# Altium PCB V1_PCB.PcbDoc
Units mm, origin at the board's own origin, x right, y up, seen from the top; angles counter-clockwise.
Board outline 200 x 150 mm, 2 copper layers (Top Layer, Bottom Layer); 195 components, 116 nets, 653 pads, 117 vias.
Unrouted connection lines stored in the file: 129.
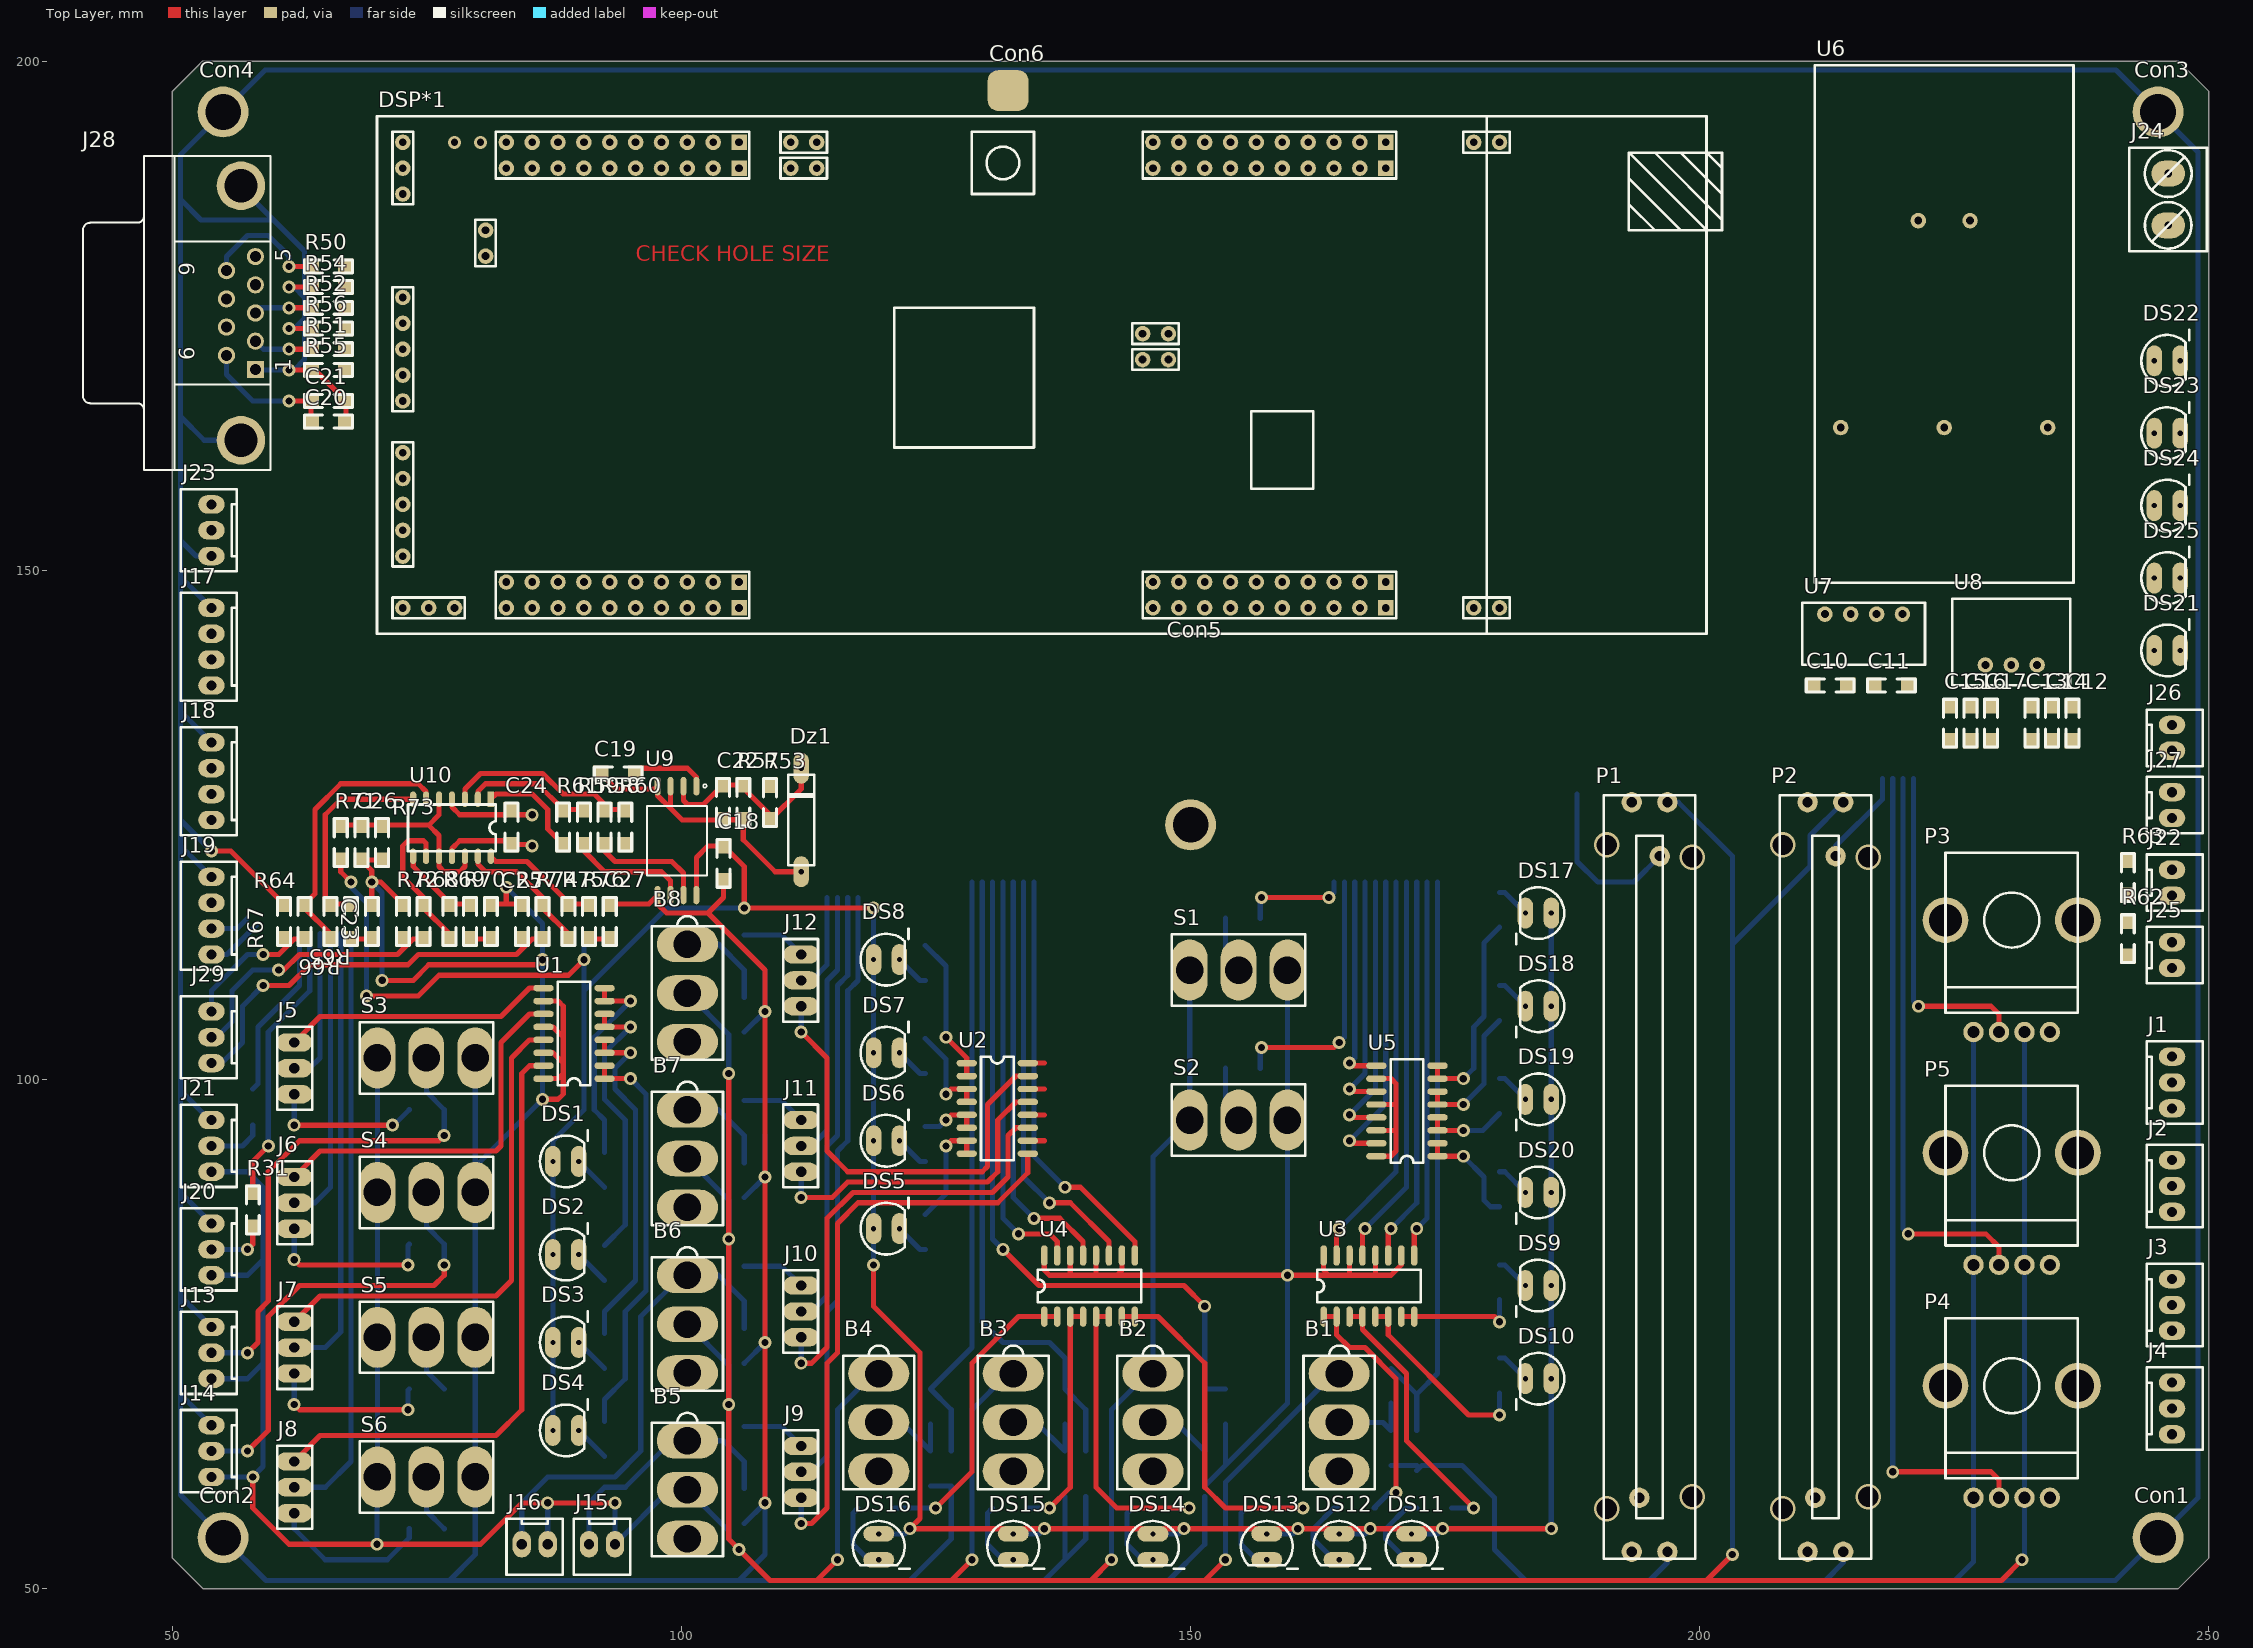
[diagram p0: Top Layer view]
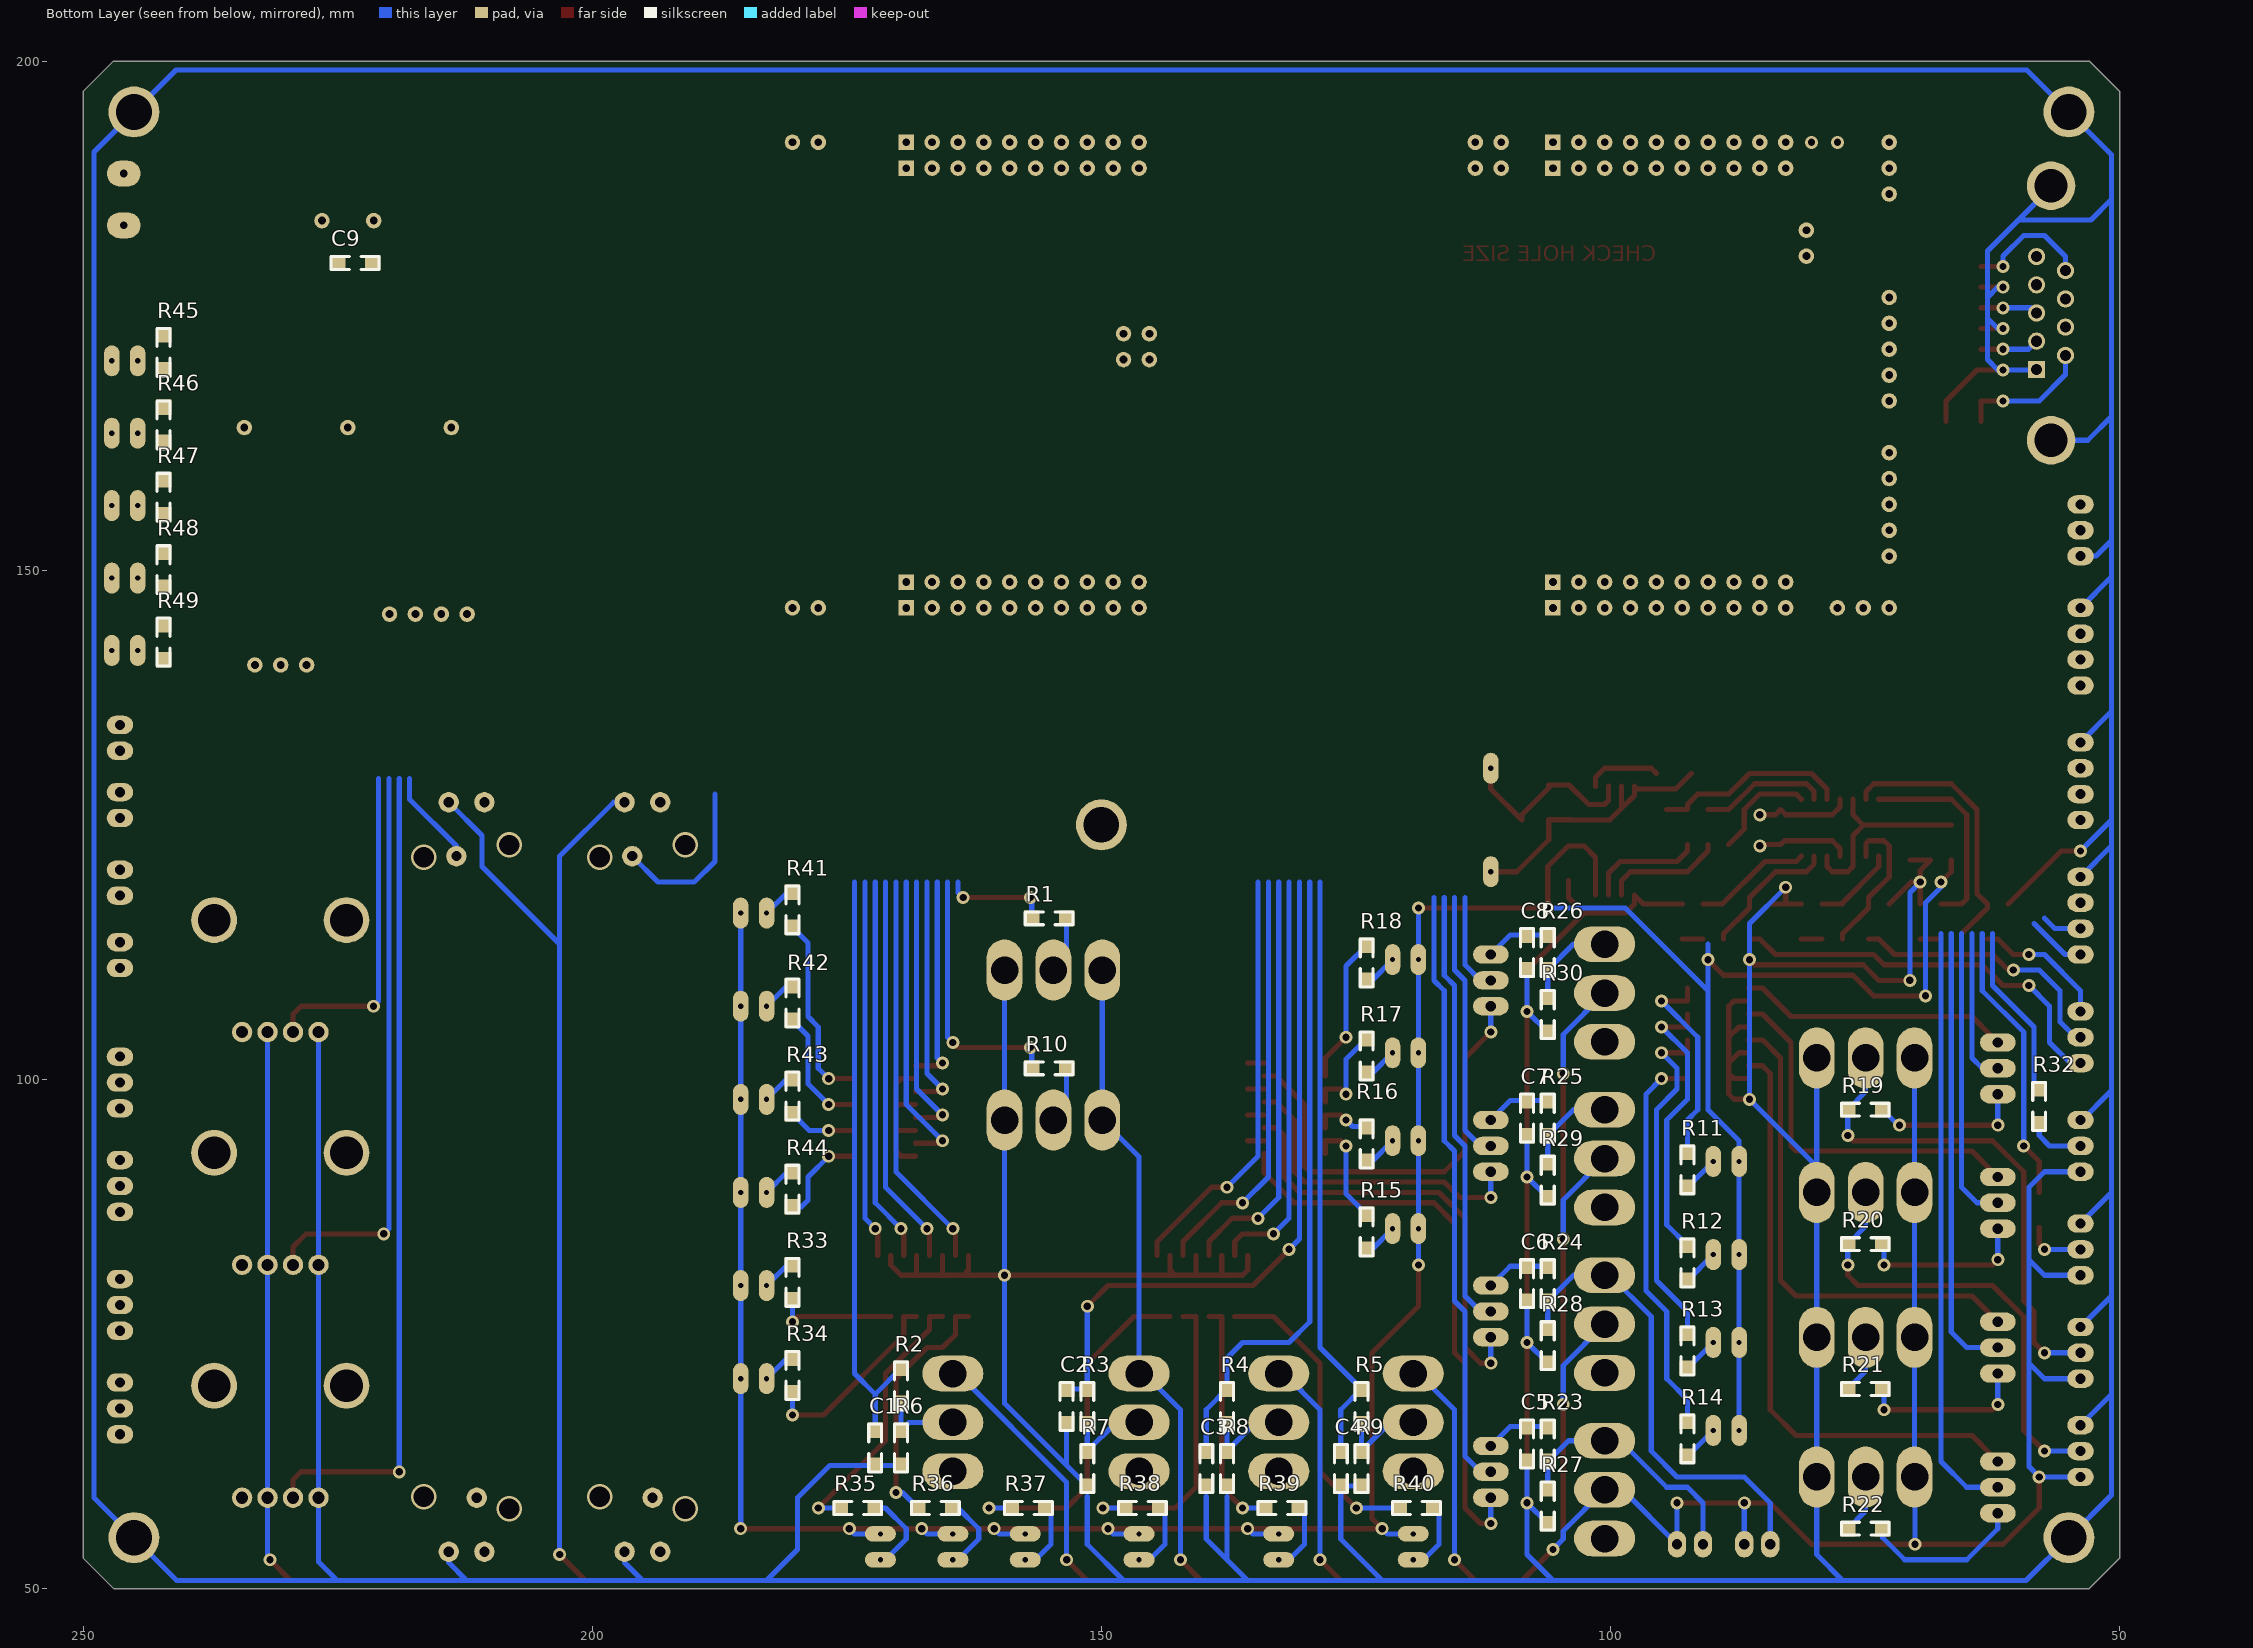
[diagram p1: Bottom Layer view, seen from below]
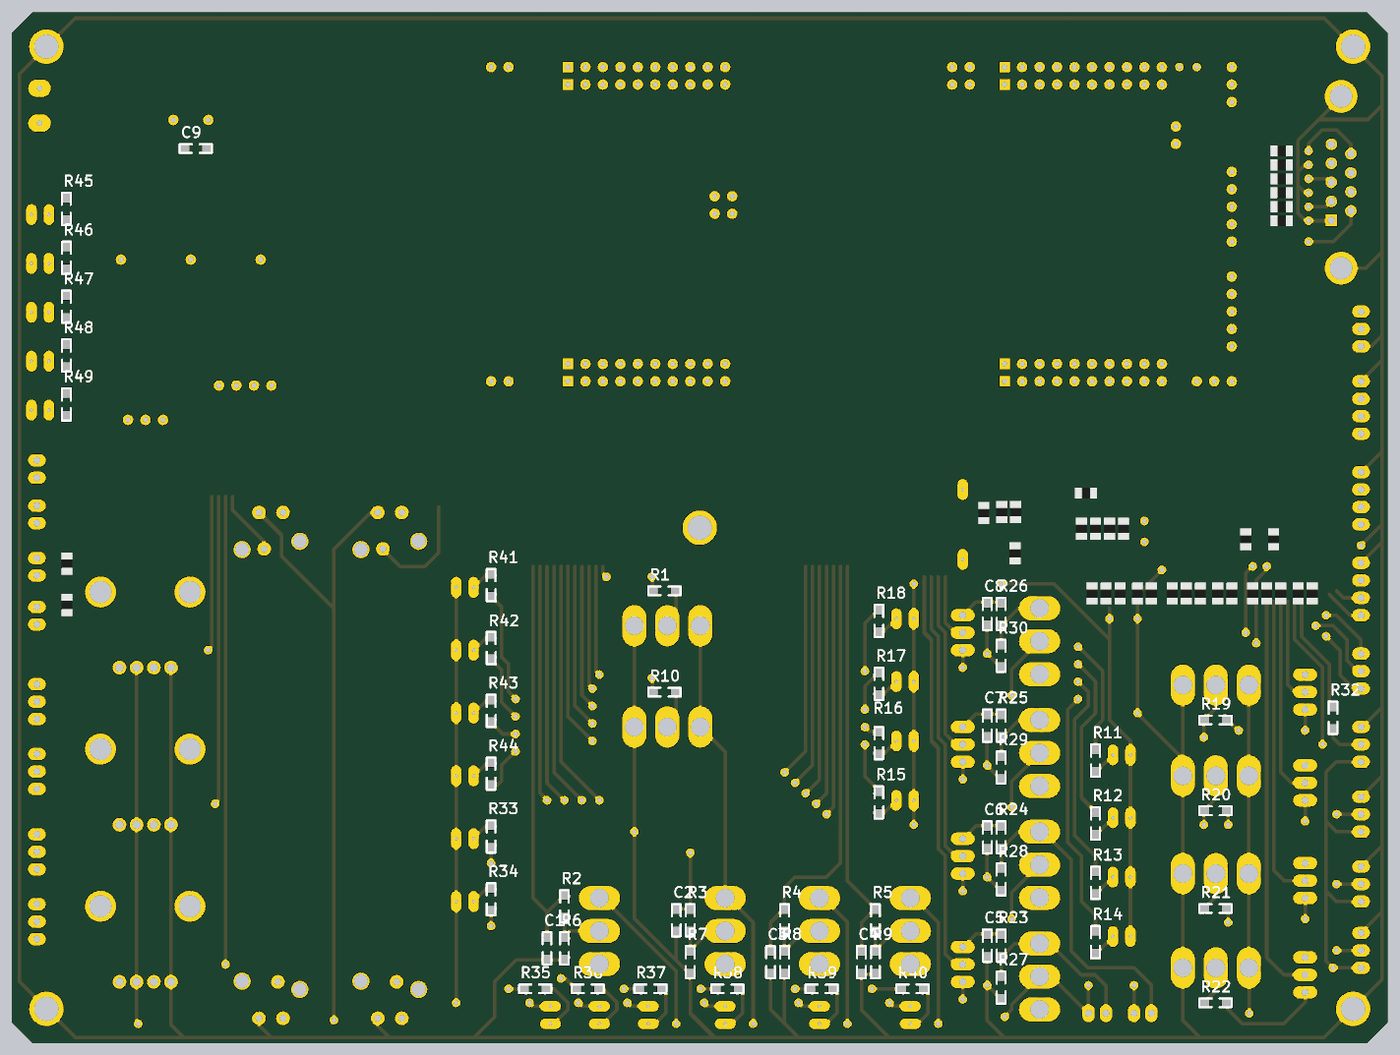
[diagram p2: 3D render of the assembled board from below, using the file's embedded part models]

## Layer stack, top to bottom
Top Solder: solder mask 0.0102, Solder Resist, Dk 3.5
Top Layer: signal copper 0.0356
Dielectric 1: dielectric 0.32, FR-4, Dk 4.8
Bottom Layer: signal copper 0.0356
Bottom Solder: solder mask 0.0102, Solder Resist, Dk 3.5

## Board outline
53,50 247,50 250,53 250,197 247,200 53,200 50,197 50,53

## Design rules (kind name [scope] priority, off if disabled: settings)
Clearance [All] p1: gap=0.381
ComponentClearance [All] p1: gap=0.254 collisioncheckmode=3 verticalgap=5 showdistances=FALSE
PolygonConnect [All] p1: connectstyle=Relief reliefconductorwidth=0.254 reliefentries=4 polygonreliefangle="90 Angle" airgapwidth=0.254
RoutingVias [All] p1: holewidth=0.711 width=1.27 viastyle="Through Hole" minholewidth=0.711 minwidth=1.27 maxholewidth=0.711 maxwidth=1.27
SolderMaskExpansion [All] p1: expansion=0.102
Width [All] p1: maxlimit=2.54 minlimit=0.254 preferedwidth=0.508
29 further rules are at their usual default settings.

## Classes and differential pairs
component class Supplies: C9 C10 C11 C12 C13 C14 C15 C16 C17 DS21 DS22 DS23 DS24 DS25 DS? J22 J23 J24 J25 J26 J27 J? R45 R46 R47 R48 R49 R? U6 U7 U8 U?
component class InputsExtras: B5 B6 B7 B8 C5 C6 C7 C8 DS1 DS2 DS3 DS4 DS5 DS6 DS7 DS8 J5 J6 J7 J8 J9 J10 J11 J12 J13 J14 J15 J16 R11 R12 R13 R14 R15 R16 R17 R18 R19 R20 R21 R22 R23 R24 R25 R26 R27 R28 R29 R30 S3 S4 S5 S6 U1 U2
component class Inputs: B1 B2 B3 B4 C1 C2 C3 C4 J1 J2 J3 J4 P1 P2 P3 P4 P5 R1 R2 R3 R4 R5 R6 R7 R8 R9 R10 S1 S2
component class DSP: DSP*1
component class SignalProcessing: C18 C19 C20 C21 C22 C23 C24 C25 C26 C27 Dz1 J28 J29 R50 R51 R52 R53 R54 R55 R56 R57 R58 R59 R60 R61 R62 R63 R64 R65 R66 R67 R68 R69 R70 R71 R72 R73 R74 R75 R76 R77 U9 U10
component class Outputs: Con1 Con2 Con3 Con4 Con5 Con6 DS10 DS11 DS12 DS13 DS14 DS15 DS16 DS17 DS18 DS19 DS20 J17 J18 J19 J20 J21 R31 R32 R33 R34 R35 R36 R37 R38 R39 R40 R41 R42 R43 R44 U3 U4 U5

## Components (designator, comment, footprint, x,y, rotation, side; value= is the part's Value field where it differs from the comment)
B1 "Button_TH" ButtonTH 164.592,71.12 r270 top
B2 "Button_TH" ButtonTH 146.304,71.12 r270 top
B3 "Button_TH" ButtonTH 132.588,71.12 r270 top
B4 "Button_TH" ButtonTH 119.38,71.12 r270 top
B5 "Button_TH" ButtonTH 100.584,64.516 r270 top
B6 "Button_TH" ButtonTH 100.584,80.772 r270 top
B7 "Button_TH" ButtonTH 100.584,97.028 r270 top
B8 "Button_TH" ButtonTH 100.584,113.284 r270 top
C1 "nF" 1206 172.212,65.532 r270 bottom
C2 "nF" 1206 153.416,69.596 r270 bottom
C3 "nF" 1206 139.7,63.5 r270 bottom
C4 "nF" 1206 126.492,63.5 r270 bottom
C5 "nF" 1206 108.204,62.484 r90 bottom
C6 "nF" 1206 108.204,78.232 r90 bottom
C7 "nF" 1206 108.204,94.488 r90 bottom
C8 "nF" 1206 108.204,110.744 r90 bottom
C9 "100nF" 1206 225,180.172 r180 bottom
C10 "100nF" 1206 211.096,138.696 r0 top
C11 "100nF" 1206 217.096,138.696 r0 top
C12 "100nF" 1206 236.588,136.696 r270 top
C13 "100nF" 1206 232.588,136.696 r270 top
C14 "100nF" 1206 234.588,136.696 r270 top
C15 "100nF" 1206 224.588,136.696 r270 top
C16 "100nF" 1206 226.588,136.696 r270 top
C17 "100nF" 1206 228.588,136.696 r270 top
C18 "100nF" 1206 104.14,122.936 r270 top
C19 "100nF" 1206 95.504,130.048 r180 top
C20 "1uF" 1206 67.056,164.592 r180 top
C21 "100nF" 1206 67.056,166.624 r180 top
C22 "10nF" 1206 104.076,128.924 r270 top
C23 "100nF" 1206 69.596,113.792 r90 top
C24 "100nF" 1206 83.312,126.492 r270 top
C25 "100nF" 1206 81.28,113.792 r90 top
C26 "10nF" 1206 68.58,124.968 r270 top
C27 "100nF" 1206 92.964,113.792 r90 top
Con1 "CON1" Support#1 245,55 r0 top
Con2 "CON1" Support#1 55,55 r0 top
Con3 "CON1" Support#1 245,195 r0 top
Con4 "CON1" Support#1 55,195 r0 top
Con5 "CON1" Support#2 150,140 r0 top
Con6 "CON1" ShortPad 132.08,197.104 r0 top
DS1 "Verde" "Led 3mm" 89.916,91.948 r270 top
DS2 "Verde" "Led 3mm" 89.916,82.804 r270 top
DS3 "Verde" "Led 3mm" 89.916,74.168 r270 top
DS4 "Verde" "Led 3mm" 89.916,65.532 r270 top
DS5 "Verde" "Led 3mm" 121.412,85.344 r270 top
DS6 "Verde" "Led 3mm" 121.412,93.98 r270 top
DS7 "Verde" "Led 3mm" 121.412,102.616 r270 top
DS8 "Verde" "Led 3mm" 121.412,111.76 r270 top
DS9 "Verde" "Led 3mm" 182.88,79.756 r90 top
DS10 "Verde" "Led 3mm" 182.88,70.612 r90 top
DS11 "Verde" "Led 3mm" 171.704,52.832 r180 top
DS12 "Verde" "Led 3mm" 164.592,52.832 r180 top
DS13 "Verde" "Led 3mm" 157.48,52.832 r180 top
DS14 "Verde" "Led 3mm" 146.304,52.832 r180 top
DS15 "Verde" "Led 3mm" 132.588,52.832 r180 top
DS16 "Verde" "Led 3mm" 119.38,52.832 r180 top
DS17 "Verde" "Led 3mm" 182.88,116.332 r90 top
DS18 "Verde" "Led 3mm" 182.88,107.188 r90 top
DS19 "Verde" "Led 3mm" 182.88,98.044 r90 top
DS20 "Verde" "Led 3mm" 182.88,88.9 r90 top
DS21 "Verde" "Led 3mm" 247.176,142.12 r270 top
DS22 "Verde" "Led 3mm" 247.176,170.568 r270 top
DS23 "Verde" "Led 3mm" 247.176,163.456 r270 top
DS24 "Verde" "Led 3mm" 247.176,156.344 r270 top
DS25 "Verde" "Led 3mm" 247.176,149.232 r270 top
DSP*1 "F28069M_DevelopmentBoard" F28069M_DevelopmentBoard 169.164,192.024 r270 top
Dz1 "v" Diodo 111.76,120.396 r90 top
J1 "Cleva 2 vias" Con3_KK_256 246.38,102.236 r270 top
J2 "Cleva 2 vias" Con3_KK_256 246.38,92.076 r270 top
J3 "Cleva 2 vias" Con3_KK_256 246.38,80.392 r270 top
J4 "Cleva 2 vias" Con3_KK_256 246.38,70.232 r270 top
J5 "Cleva 2 vias" con_3_100milis 61.976,98.552 r180 top
J6 "Cleva 2 vias" con_3_100milis 61.976,85.344 r180 top
J7 "Cleva 2 vias" con_3_100milis 61.976,71.12 r180 top
J8 "Cleva 2 vias" con_3_100milis 61.976,57.404 r180 top
J9 "Cleva 2 vias" con_3_100milis 111.76,64.008 r0 top
J10 "Cleva 2 vias" con_3_100milis 111.76,79.756 r0 top
J11 "Cleva 2 vias" con_3_100milis 111.76,96.012 r0 top
J12 "Cleva 2 vias" con_3_100milis 111.76,112.268 r0 top
J13 "Cleva 2 vias" Con3_KK_256 53.848,70.612 r90 top
J14 "Cleva 2 vias" Con3_KK_256 53.848,60.96 r90 top
J15 "Cleva 2 vias" Con2_KK_256 93.472,54.356 r180 top
J16 "Cleva 2 vias" Con2_KK_256 86.868,54.356 r180 top
J17 "Cleva 2 vias" Con4_KK_256 53.848,138.684 r90 top
J18 "Cleva 2 vias" Con4_KK_256 53.848,125.476 r90 top
J19 "Cleva 2 vias" Con4_KK_256 53.848,112.268 r90 top
J20 "Cleva 2 vias" Con3_KK_256 53.848,80.772 r90 top
J21 "Cleva 2 vias" Con3_KK_256 53.848,90.932 r90 top
J22 "Cleva 2 vias" Con2_KK_256 246.38,120.588 r270 top
J23 "Cur_meas_con" Con3_KK_256 53.848,151.384 r90 top
J24 "Cleva 2 vias" Clema_2_vias 246,189 r270 top
J25 "Cleva 2 vias" Con2_KK_256 246.38,113.476 r270 top
J26 "Cleva 2 vias" Con2_KK_256 246.38,134.812 r270 top
J27 "Cleva 2 vias" Con2_KK_256 246.38,128.208 r270 top
J28 "D Connector 9" DSUB1.385-2H9 47.244,175.26 r90 top
J29 "Cleva 2 vias" Con3_KK_256 53.848,101.6 r90 top
P1 "POT" SliderPot_PTA6044 195.072,90.424 r270 top
P2 "POT" SliderPot_PTA6044 212.344,90.424 r270 top
P3 "POT" POT_RK11K1140A3L 230.632,104.648 r0 top
P4 "POT" POT_RK11K1140A3L 230.632,58.928 r0 top
P5 "POT" POT_RK11K1140A3L 230.632,81.788 r0 top
R1 "RK" 1206 153.416,115.824 r0 bottom
R2 "RK" 1206 169.672,71.628 r270 bottom
R3 "RK" 1206 151.384,69.596 r270 bottom
R4 "RK" 1206 137.668,69.596 r270 bottom
R5 "RK" 1206 124.46,69.596 r270 bottom
R6 "RK" 1206 169.672,65.532 r270 bottom
R7 "RK" 1206 151.384,63.5 r270 bottom
R8 "RK" 1206 137.668,63.5 r270 bottom
R9 "RK" 1206 124.46,63.5 r270 bottom
R10 "RK" 1206 153.416,101.092 r0 bottom
R11 "RK" 1206 92.456,89.408 r90 bottom
R12 "RK" 1206 92.456,80.264 r90 bottom
R13 "RK" 1206 92.456,71.628 r90 bottom
R14 "RK" 1206 92.456,62.992 r90 bottom
R15 "RK" 1206 123.952,83.312 r90 bottom
R16 "RK" 1206 123.952,91.948 r90 bottom
R17 "RK" 1206 123.952,100.584 r90 bottom
R18 "RK" 1206 123.952,109.728 r90 bottom
R19 "RK" 1206 76.708,97.028 r180 bottom
R20 "RK" 1206 76.708,83.82 r180 bottom
R21 "RK" 1206 76.708,69.596 r180 bottom
R22 "RK" 1206 76.708,55.88 r180 bottom
R23 "RK" 1206 106.172,62.484 r90 bottom
R24 "RK" 1206 106.172,78.232 r90 bottom
R25 "RK" 1206 106.172,94.488 r90 bottom
R26 "RK" 1206 106.172,110.744 r90 bottom
R27 "RK" 1206 106.172,56.388 r90 bottom
R28 "RK" 1206 106.172,72.136 r90 bottom
R29 "RK" 1206 106.172,88.392 r90 bottom
R30 "RK" 1206 106.172,104.648 r90 bottom
R31 "RK" 1206 57.912,88.9 r270 top
R32 "RK" 1206 57.912,99.06 r270 bottom
R33 "RK" 1206 180.34,81.788 r270 bottom
R34 "RK" 1206 180.34,72.644 r270 bottom
R35 "RK" 1206 172.212,57.912 r0 bottom
R36 "RK" 1206 164.592,57.912 r0 bottom
R37 "RK" 1206 155.448,57.912 r0 bottom
R38 "RK" 1206 144.272,57.912 r0 bottom
R39 "RK" 1206 130.556,57.912 r0 bottom
R40 "RK" 1206 117.348,57.912 r0 bottom
R41 "RK" 1206 180.34,118.364 r270 bottom
R42 "RK" 1206 180.34,109.22 r270 bottom
R43 "RK" 1206 180.34,100.076 r270 bottom
R44 "RK" 1206 180.34,90.932 r270 bottom
R45 "65R" 1206 242.096,173.108 r270 bottom
R46 "150R" 1206 242.096,165.996 r270 bottom
R47 "150R" 1206 242.096,158.884 r270 bottom
R48 "650R" 1206 242.096,151.772 r270 bottom
R49 "650R" 1206 242.096,144.66 r270 bottom
R50 "1k" 1206 67.056,179.832 r180 top
R51 "1k" 1206 67.056,171.704 r180 top
R52 "1k" 1206 67.056,175.768 r180 top
R53 "21.5k" 1206 108.712,125.476 r90 top
R54 "1.78k" 1206 67.056,177.8 r180 top
R55 "1.78k" 1206 67.056,169.672 r180 top
R56 "1.78k" 1206 67.056,173.736 r180 top
R57 "1k" 1206 106.076,128.924 r270 top
R58 "10k" 1206 92.456,126.492 r270 top
R59 "10k" 1206 90.424,126.492 r270 top
R60 "16.2k" 1206 94.488,126.492 r270 top
R61 "16.2k" 1206 88.392,126.492 r270 top
R62 "8.2k" 1206 242.032,112.104 r90 top
R63 "1k" 1206 242.032,118.104 r90 top
R64 "10k" 1206 62.992,113.792 r90 top
R65 "10k" 1206 65.532,113.792 r90 top
R66 "2.61k" 1206 67.564,113.792 r90 top
R67 "9.09R" 1206 60.96,113.792 r90 top
R68 "10k" 1206 74.676,113.792 r90 top
R69 "10k" 1206 77.216,113.792 r90 top
R70 "2.61k" 1206 79.248,113.792 r90 top
R71 "61.9k" 1206 66.548,124.968 r270 top
R72 "9.09R" 1206 72.644,113.792 r90 top
R73 "12.1k" 1206 70.612,124.968 r270 top
R74 "10k" 1206 86.36,113.792 r90 top
R75 "10k" 1206 88.9,113.792 r90 top
R76 "2.61k" 1206 90.932,113.792 r90 top
R77 "9.09R" 1206 84.328,113.792 r90 top
S1 "Switch" SwitchTH_2Pos 159.512,110.744 r180 top
S2 "Switch" SwitchTH_2Pos 159.512,96.012 r180 top
S3 "Switch" SwitchTH_2Pos 79.756,102.108 r180 top
S4 "Switch" SwitchTH_2Pos 79.756,88.9 r180 top
S5 "Switch" SwitchTH_2Pos 79.756,74.676 r180 top
S6 "Switch" SwitchTH_2Pos 79.756,60.96 r180 top
U1 "MMPQ3904" SO-16 92.456,100.076 r180 top
U2 "MMPQ3904" SO-16 128.016,101.6 r0 top
U3 "MMPQ3904" SO-16 163.068,76.708 r90 top
U4 "MMPQ3904" SO-16 135.636,76.708 r90 top
U5 "MMPQ3904" SO-16 174.244,92.456 r180 top
U6 "TEL15-2423" TEL15-2423 224,174.172 r270 top
U7 "CRE1S0505" CRE1S0505SC 216.096,145.696 r0 top
U8 "TSR 1-2450" "TSR 1-2450" 230.588,140.696 r180 top
U9 "ACPL-C870-000E" SOIC127P1150X360-8N 99.568,123.444 r270 top
U10 "LM324" SOIC_14 81.28,127.508 r270 top

## Footprints (in the part's own frame and the unit in brackets; to place one, negate y for a bottom-side part, rotate by r counter-clockwise, add the part's x,y. Pads: shape width x height; smd on the part's side, far side on the other; paste and mask are expansions set on the pad)
1206 [mil] "SMD R&C"
  rect 60x60 smd: 1(0,0) 2(135,0)
  silkscreen extent -25,-25 160,25, body extent 2,-31 128,31
ButtonTH [mm]
  oval 3.5x6 hole 2.7: 0(0,0) 1(4.8,0) 2(9.6,0)
  silkscreen extent -2.75,-3.5 11.35,3.5
Clema_2_vias [mil] "Conector 2 vias"
  oval 100x130 hole 30: 1(1.97,0) 2(201.97,0)
  silkscreen extent -98,-150 302,150
Con2_KK_256 [mm]
  oval 1.8x2.6 hole 1: 1(0,0) 2(2.54,0)
  silkscreen extent -1.5,-2.5 4.04,3
Con3_KK_256 [mm]
  oval 1.8x2.6 hole 1: 1(0,0) 2(2.54,0) 3(5.08,0)
  silkscreen extent -1.5,-2.5 6.58,3
Con4_KK_256 [mm]
  oval 1.8x2.6 hole 1: 1(0,0) 2(2.54,0) 3(5.08,0) 4(7.62,0)
  silkscreen extent -1.5,-2.5 9.12,3
con_3_100milis [mm]
  oval 3.5x1.8 hole 1: 1(0,0) 2(0,-2.54) 3(0,-5.08)
  silkscreen extent -1.78,-6.6 1.65,1.52
CRE1S0505SC [mil]
  round 60 hole 30: 1(-150,0) 2(-50,0) 3(50,0) 4(150,0)
  silkscreen extent -237,-196 237,44
Diodo [mil] "Diodo"
  oval 120x60 hole 20: 1(0,0) 2(400,0)
  silkscreen extent 25,-50 375,50
DSUB1.385-2H9 [mm] "Connector; D Subminiature; 9 Position; Right Angle; Pitch 1.385 mm"
  rect 1.69x1.69 hole 1.09: 1(-5.54,-10.92)
  round 1.69 hole 1.09: 2(-2.77,-10.92) 3(0,-10.92) 4(2.77,-10.92) 5(5.54,-10.92) 6(-4.155,-8.08) 7(-1.385,-8.08) 8(1.385,-8.08) 9(4.155,-8.08)
  round 4.76 hole 3.26: 10(-12.495,-9.5) 11(12.495,-9.5)
  silkscreen extent -15.4,-12.4 15.4,6
F28069M_DevelopmentBoard [mil]
  rect 60x60 hole 30: 1(0,0) 20(1800,0) 21(100,0) 40(1700,0) 41(0,-2500) 60(1800,-2500) 61(100,-2500) 80(1700,-2500)
  round 60 hole 30: 2(0,-100) 3(0,-200) 4(0,-300) 5(0,-400) 6(0,-500) 7(0,-600) 8(0,-700) 9(0,-800) 10(0,-900) 11(1800,-900) 12(1800,-800) 13(1800,-700) 14(1800,-600) 15(1800,-500) 16(1800,-400) 17(1800,-300) 18(1800,-200) 19(1800,-100) 22(100,-100) 23(100,-200) 24(100,-300) 25(100,-400) 26(100,-500) 27(100,-600) 28(100,-700) 29(100,-800) 30(100,-900) 31(1700,-900) 32(1700,-800) 33(1700,-700) 34(1700,-600) 35(1700,-500) 36(1700,-400) 37(1700,-300) 38(1700,-200) 39(1700,-100) 42(0,-2600) 43(0,-2700) 44(0,-2800) 45(0,-2900) 46(0,-3000) 47(0,-3100) 48(0,-3200) 49(0,-3300) 50(0,-3400) 51(1800,-3400) 52(1800,-3300) 53(1800,-3200) 54(1800,-3100) 55(1800,-3000) 56(1800,-2900) 57(1800,-2800) 58(1800,-2700) 59(1800,-2600) 62(100,-2600) 63(100,-2700) 64(100,-2800) 65(100,-2900) 66(100,-3000) 67(100,-3100) 68(100,-3200) 69(100,-3300) 70(100,-3400) 71(1700,-3400) 72(1700,-3300) 73(1700,-3200) 74(1700,-3100) 75(1700,-3000) 76(1700,-2900) 77(1700,-2800) 78(1700,-2700) 79(1700,-2600) 81(1800,-3600) 82(1800,-3700) 83(1800,-3800) 84(1600,-3800) 85(1500,-3800) 86(1400,-3800) 87(1300,-3800) 88(1200,-3800) 89(1000,-3800) 90(900,-3800) 91(800,-3800) 92(700,-3800) 93(600,-3800) 94(200,-3800) 95(100,-3800) 96(0,-3800) 97(1800,340) 98(1800,440) 99(0,340) 100(0,440) 101(0,-2300) 102(0,-2200) 103(100,-2300) 104(100,-2200) 105(740,-940) 106(740,-840) 107(840,-940) 108(840,-840) 109(340,-3480) 110(440,-3480)
  silkscreen extent -100,-3900 1900,1300
"Led 3mm" [mil] "no está modificado"
  oval 120x60 hole 20: A(0,-100) K(0,0)
  silkscreen extent -120,-150 100,35
POT_RK11K1140A3L [mm]
  round 4.5 hole 3.2: 1(-6.5,11) 1(6.5,11)
  round 2 hole 1.2: 1(-3.75,0) 2(-1.25,0) 3(1.25,0) ""(3.75,0)
  silkscreen extent -6.5,1.9 6.5,17.6
ShortPad [mm]
  rrect50% 4x4 smd: 1(0,0)
SliderPot_PTA6044 [mm]
  round 2 hole 1: 1(-36.8,1.75) 1'(-36.8,-1.75) 2(-31.5,1) 2'(31.5,-1) 3(36.8,1.75) 3'(36.8,-1.75)
  silkscreen extent -37.5,-4.5 37.5,4.5
SO-16 [mm]
  oval 2x0.635 smd: 1(0,0) 2(0,-1.27) 3(0,-2.54) 4(0,-3.81) 5(0,-5.08) 6(0,-6.35) 7(0,-7.62) 8(0,-8.89) 9(6,-8.89) 10(6,-7.62) 11(6,-6.35) 12(6,-5.08) 13(6,-3.81) 14(6,-2.54) 15(6,-1.27) 16(6,0)
  silkscreen extent 1.4,-9.53 4.6,0.64
SOIC127P1150X360-8N [mm]
  oval 1.8x0.6 smd: 1(-5.35,1.905) 2(-5.35,0.635) 3(-5.35,-0.635) 4(-5.35,-1.905) 5(5.35,-1.905) 6(5.35,-0.635) 7(5.35,0.635) 8(5.35,1.905)
  silkscreen extent -5.54,-2.93 3.4,2.93
SOIC_14 [mil]
  rect 60x24 smd: 1(0,0)
  oval 60x24 smd: 2(0,-50) 3(0,-100) 4(0,-150) 5(0,-200) 6(0,-250) 7(0,-300) 8(220.47,-300) 9(220.47,-250) 10(220.47,-200) 11(220.47,-150) 12(220.47,-100) 13(220.47,-50) 14(220.47,0)
  silkscreen extent 20,-320 201,20
Support#1 [mm]
  round 5 hole 3.5: 1(0,0)
Support#2 [mm]
  round 5 hole 3.5: 1(0,-15)
SwitchTH_2Pos [mm]
  oval 3.5x6 hole 2.7: 0(0,0) 1(4.8,0) 2(9.6,0)
  silkscreen extent -1.75,-3.5 11.35,3.5
TEL15-2423 [mil]
  round 60 hole 30: 1(-400,100) 2(-400,-100) 3(400,-400) 4(400,0) 5(400,400)
  silkscreen extent -1000,-500 1000,500
"TSR 1-2450" [mil]
  round 60 hole 30: 1(-100,0) 2(0,0) 3(100,0)
  silkscreen extent -228,-256 228,79

## Part data
C1 C2 C3 C4 C5 C6 C7 C8 C9 C10 C11 C12 C13 C14 C15 C16 C17 C18 C19 C20 C21 C22 C23 C24 C25 C26 C27: library part Condensador, "Condensador"
DS1 DS2 DS3 DS4 DS5 DS6 DS7 DS8 DS9 DS10 DS11 DS12 DS13 DS14 DS15 DS16 DS17 DS18 DS19 DS20 DS21 DS22 DS23 DS24 DS25: library part Led
Dz1: library part Zener
J1 J2 J3 J4 J5 J6 J7 J8 J9 J10 J11 J12 J13 J14 J20 J21 J23 J29: library part Con_3
J15 J16 J22 J24 J25 J26 J27: library part Con_2
J17 J18 J19: library part Con_4
J28: "Receptacle Assembly, 9 Position, Right Angle"
P1 P2 P3 P4 P5: "POTENCIOMETRO"
R1 R2 R3 R4 R5 R6 R7 R8 R9 R10 R11 R12 R13 R14 R15 R16 R17 R18 R19 R20 R21 R22 R23 R24 R25 R26 R27 R28 R29 R30 R31 R32 R33 R34 R35 R36 R37 R38 R39 R40 R41 R42 R43 R44 R45 R46 R47 R48 R49 R50 R51 R52 R53 R54 R55 R56 R57 R58 R59 R60 R61 R62 R63 R64 R65 R66 R67 R68 R69 R70 R71 R72 R73 R74 R75 R76 R77: library part Resistencia, "Resistencia"
U9: "Isolation Amplifier [Broadcom] ACPL-C870-000E Isolation Amplifier"
U10: library part LMC6484IM_1, "14 pin CMOS Quad Rail to Rail Input and Output Operational Amplifier 55 per tube"

## Via types
v1: diameter 1.27, hole 0.711, Top Layer to Bottom Layer, 109 vias
v2: diameter 2.5, hole 2, Top Layer to Bottom Layer, 8 vias

## Nets (pads, with @x,y where several pads share a name; then routed paths per layer and width w, separated by ;. In a path a pad name is that pad's centre, name@x,y a point inside that pad or via, vN(x,y) a via of type N, cw(c..) or ccw(c..) an arc to the next point about the centre after c; other vN are vias at no path point)
3.3V: B1.0 B2.0 B3.0 B4.0 B5.1 B6.1 B7.1 B8.1 J3.1 J4.1 J13.1 J14.1 J15.1 J16.1 J20.1 J21.1 P1.1 P2.1 P3.3 P4.3 P5.3 R45.1 S1.2 S2.2 S3.2 S4.2 S5.2 S6.2 | length 656.9
  Top Layer w0.508: v1(57.912,60.96) 57.912,57.912 61.468,54.356 v1(70.104,54.356) 80.264,54.356 84.328,58.42 v1(86.868,58.42) v1(93.472,58.42) ; v1(104.648,100.584) v1(104.648,84.328) v1(104.648,68.072) 104.648,54.864 v1(105.664,53.848) 108.712,50.8 113.284,50.8 ; v1(115.316,52.832) 113.284,50.8 ; v1(128.524,52.832) 126.492,50.8 ; v1(142.24,52.832) 140.208,50.8 ; v1(153.416,52.832) 151.384,50.8 ; 200.66,50.8 v1(203.2,53.34) ; v1(231.648,52.832) 229.616,50.8 151.384,50.8 ; 113.284,50.8 126.492,50.8 ; 126.492,50.8 140.208,50.8 ; 140.208,50.8 151.384,50.8
  Bottom Layer w0.508: J14.1 v1(57.912,60.96) 58.928,61.976 58.928,72.136 ; J13.1 57.404,70.612 58.928,72.136 ; J20.1 57.404,80.772 58.928,82.296 ; J21.1 57.404,90.932 58.928,89.408 58.928,82.296 ; v1(70.104,54.356) S6.2@70.104,60.908 ; S6.2 S5.2 S4.2 S3.2 ; J16.1 v1(86.868,58.42) ; v1(93.472,58.42) J15.1 98.832,59.716 B5.1 104.648,55.652 104.648,54.864 v1(105.664,53.848) ; B6.1 104.648,71.908 v1(104.648,68.072) ; B7.1 104.648,88.164 v1(104.648,84.328) ; B8.1 104.648,104.42 v1(104.648,100.584) ; v1(115.316,52.832) 115.316,67.564 B4.0@119.38,71.628 ; v1(128.524,52.832) 128.524,67.564 132.08,71.12 B3.0 ; v1(142.24,52.832) 142.24,67.564 145.796,71.12 B2.0 146.304,92.404 S2.2 S1.2 ; v1(153.416,52.832) 153.416,60.452 164.084,71.12 B1.0 ; P1.1 197.896,127.224 203.2,121.92 203.2,113.284 ; v1(203.2,53.34) 203.2,113.284 ; P2.1 210.82,123.95 210.82,120.904 203.2,113.284 ; v1(231.648,52.832) 231.882,53.066 P4.3 P5.3 P3.3 ; 58.928,72.136 58.928,82.296
5V: C10.2 C15.1 C16.1 C17.1 C18.1 C20.2 C21.2 DS1.A DS2.A DS3.A DS4.A DS5.A DS6.A DS7.A DS8.A DS9.A DS10.A DS11.A DS12.A DS13.A DS14.A DS15.A DS16.A DS17.A DS18.A DS19.A DS20.A J1.1 J2.1 J24.1 J28.6 R46.1 R71.2 U7.2 U8.3 U9.8 | length 351.4
  Top Layer w0.508: v1(61.468,166.624) C21.2 C20.2 ; R71.2 66.548,120.396 v1(67.564,119.38) ; v1(69.088,108.204) 74.168,108.204 76.2,110.236 88.9,110.236 v1(90.424,111.76) ; U9.8 101.473,121.793 102.616,122.936 C18.1 106.172,120.904 v1(106.172,116.84) v1(118.872,116.84) ; v1(118.872,81.788) 118.872,77.724 123.444,73.152 123.444,56.896 v1(122.428,55.88) v1(135.636,55.88) v1(160.528,55.88) v1(167.64,55.88) v1(174.752,55.88) v1(185.42,55.88)
  Bottom Layer w0.508: J28.6 55.324,169.212 57.912,166.624 v1(61.468,166.624) ; v1(67.564,119.38) 67.564,118.872 69.088,117.348 v1(69.088,108.204) ; DS4.A DS3.A DS2.A DS1.A 87.376,93.98 90.424,97.028 90.424,108.712 ; 90.424,113.284 90.424,108.712 ; v1(106.172,116.84) 98.552,116.84 90.424,108.712 ; v1(118.872,81.788) DS5.A DS6.A DS7.A DS8.A v1(118.872,116.84) ; DS16.A 121.92,55.372 v1(122.428,55.88) ; DS15.A 135.128,55.372 v1(135.636,55.88) ; DS14.A 148.844,55.372 v1(149.352,55.88) ; DS13.A 160.02,55.372 v1(160.528,55.88) ; DS12.A 167.132,55.372 v1(167.64,55.88) ; DS11.A 174.244,55.372 v1(174.752,55.88) ; v1(185.42,55.88) DS10.A DS9.A DS20.A DS19.A DS18.A DS17.A
5V_PS: C11.2 C19.1 R47.1 U7.4 U9.1 | length 7.4
  Top Layer w0.508: C19.1 96.012,130.556 100.584,130.556 101.473,129.667 U9.1
24V: C9.1 C12.1 C13.1 C14.1 J17.3 J18.3 J19.3 J22.2 J26.1 R62.1 U6.1 U8.1
36V: J25.1 R53.2
+15V: C24.1 J23.3 R48.1 U6.3 U10.4 | length 9.4
  Top Layer w0.508: U10.4 77.47,126.746 78.232,125.984 82.804,125.984 C24.1 83.82,125.984 v1(85.344,125.984)
-15V: C24.2 J23.2 R49.1 U6.5 U10.11 | length 9.2
  Top Layer w0.508: U10.11 77.47,122.682 78.232,123.444 82.931,123.444 C24.2 85.217,123.063 v1(85.344,122.936)
COM: DS21.A DS25.K U6.4
GND: C1.2 C2.2 C3.2 C4.2 C5.1 C6.1 C7.1 C8.1 C9.2 C10.1 C12.2 C13.2 C14.2 C15.2 C16.2 C17.2 C18.2 C20.1 C21.1 C23.2 C25.2 C26.2 C27.2 Con1.1 Con2.1 Con3.1 Con4.1 Con5.1 Con6.1 DS22.K DS23.K DSP*1.22 J1.3 J2.3 J3.3 J4.3 J13.3 J14.3 J17.4 J18.4 J19.4 J20.3 J21.3 J22.1 J23.1 J24.2 J27.2 J28.1 J28.10 J28.11 P1.3 P2.3 P3.1 P4.1 P5.1 R6.2 R7.2 R8.2 R9.2 R27.1 R28.1 R29.1 R30.1 R54.2 R55.2 R56.2 R60.2 R63.2 R67.2 R72.2 R73.2 R77.2 S1.0 S2.0 S3.0 S4.0 S5.0 S6.0 U1.10 U1.12 U1.14 U1.16 U2.10 U2.12 U2.14 U2.16 U3.10 U3.12 U3.14 U3.16 U4.10 U4.12 U4.14 U4.16 U5.10 U5.12 U5.14 U5.16 U6.2 U7.1 U8.2 U9.5 | length 1288.7
  Top Layer w0.508: v1(53.848,122.428) 55.753,122.428 R67.2 ; v1(61.468,169.672) R55.2 64.008,169.672 C21.1 C20.1 ; v1(61.468,173.736) R56.2 ; v1(61.468,177.8) R54.2 ; C23.2 v1(69.596,119.38) ; v1(70.612,109.728) 73.66,109.728 75.184,111.252 85.852,111.252 v1(86.36,111.76) ; R73.2 C26.2 69.596,120.523 v1(69.596,119.38) ; R72.2 70.485,119.38 v1(69.596,119.38) ; C25.2 82.804,117.221 ; v1(82.804,118.872) 82.804,117.221 ; R77.2 82.804,117.221 ; v1(86.36,98.044) 87.884,98.044 88.392,98.552 88.392,100.584 ; U1.16 87.884,100.076 88.392,100.584 ; U1.14 87.376,102.616 88.392,101.6 ; U1.12 87.376,105.156 88.392,104.14 ; U1.10 87.884,107.696 88.392,107.188 88.392,104.14 ; C27.2 96.79,117.221 U9.5 97.663,117.221 98.552,116.332 102.616,116.332 ; C18.2 104.14,117.856 102.616,116.332 ; v1(108.204,58.42) v1(108.204,74.168) v1(108.204,90.424) v1(108.204,106.68) 108.204,110.744 102.616,116.332 ; U2.10 135.636,93.98 ; U2.12 135.636,96.52 ; U2.14 135.636,99.06 ; U2.16 135.636,101.6 ; U4.16 135.636,81.28 136.144,80.772 138.176,80.772 ; U4.14 138.176,80.772 ; U4.12 140.716,80.772 ; U4.10 143.256,81.28 142.748,80.772 ; U3.16 163.068,81.28 163.576,80.772 ; U3.14 165.608,80.772 ; U3.12 168.148,80.772 ; U5.16 169.672,92.456 170.18,92.964 170.18,94.996 ; U5.14 170.18,94.996 ; U5.12 170.18,97.536 ; U5.10 169.672,100.076 170.18,99.568 170.18,97.536 ; U3.10 170.688,81.788 169.672,80.772 168.148,80.772 ; 88.392,100.584 88.392,101.6 ; 88.392,101.6 88.392,104.14 ; 138.176,80.772 140.716,80.772 ; 140.716,80.772 142.748,80.772 ; 142.748,80.772 163.576,80.772 ; 163.576,80.772 165.608,80.772 ; 165.608,80.772 168.148,80.772 ; 170.18,94.996 170.18,97.536
  Bottom Layer w0.508: J14.3 50.8,69.088 ; J13.3 50.8,78.74 ; J20.3 50.8,88.9 ; J21.3@53.848,95.852 50.8,98.9 ; J19.4 50.8,122.936 ; v1(53.848,122.428) 50.8,125.476 ; J18.4 50.8,136.144 ; J17.4 50.8,149.352 ; J23.1 52.324,151.384 50.8,152.908 ; J28.10 53.135,162.765 50.8,165.1 ; J28.11 56.744,187.604 59.944,184.404 ; J28.1@58.212,169.672 v1(61.468,169.672) 61.976,169.672 62.992,170.688 62.992,174.752 ; v1(61.468,173.736) 61.976,173.736 62.992,174.752 ; v1(61.468,177.8) 61.976,177.8 62.992,176.784 ; v1(69.596,119.38) 70.612,118.364 v1(70.612,109.728) ; S3.0 S4.0@79.756,91.44 ; v1(82.804,118.872) 86.36,115.316 v1(86.36,98.044) S4.0@79.756,91.44 ; R27.1 v1(108.204,58.42) ; R28.1 v1(108.204,74.168) C6.1 ; R29.1 v1(108.204,90.424) C7.1 ; R30.1 v1(108.204,106.68) C8.1 ; C5.1 v1(108.204,58.42) ; R9.2 C4.2 126.492,54.864 122.428,50.8 ; 137.668,59.055 137.668,52.832 ; 139.7,59.055 139.7,54.864 137.668,52.832 ; 151.384,59.055 151.384,54.356 147.828,50.8 ; R7.2 153.416,62.103 ; C2.2 153.416,62.103 ; S1.0 S2.0 v1(159.512,80.772) 159.512,68.199 153.416,62.103 ; R6.2 C1.2 ; C1.2@172.212,61.595 172.72,62.103 176.657,62.103 179.832,58.928 179.832,53.848 182.88,50.8 ; P1.3 196.822,52.55 195.072,50.8 ; P2.3 214.094,52.55 212.344,50.8 ; P3.1@226.882,104.648 226.882,81.788 226.882,58.928 226.882,52.638 225.044,50.8 ; 50.8,69.088 50.8,59.2 Con2.1 59.2,50.8 77.216,50.8 ; 50.8,69.088 50.8,78.74 ; 50.8,78.74 50.8,88.9 ; 50.8,88.9 50.8,98.9 ; 50.8,98.9 50.8,122.936 ; 50.8,122.936 50.8,125.476 ; 50.8,125.476 50.8,136.144 ; 50.8,136.144 50.8,149.352 ; 50.8,149.352 50.8,152.908 ; 50.8,152.908 50.8,165.1 ; 50.8,165.1 50.8,186.436 ; 50.8,186.436 52.832,184.404 59.944,184.404 ; 50.8,186.436 50.8,190.8 59.136,199.136 240.864,199.136 Con3.1 248.92,191.08 248.92,58.92 Con1.1 240.8,50.8 225.044,50.8 ; 59.944,184.404 62.992,181.356 62.992,176.784 ; 62.992,174.752 62.992,176.784 ; 77.216,50.8 79.756,53.34 S6.0 S5.0 S4.0 S4.0@79.756,91.44 ; 77.216,50.8 105.664,50.8 ; 105.664,50.8 108.204,53.34 v1(108.204,58.42) ; 105.664,50.8 122.428,50.8 ; 122.428,50.8 135.636,50.8 ; 135.636,50.8 137.668,52.832 ; 135.636,50.8 147.828,50.8 ; 147.828,50.8 182.88,50.8 ; 182.88,50.8 195.072,50.8 ; 195.072,50.8 212.344,50.8 ; 212.344,50.8 225.044,50.8
GND_PS: C11.1 C19.2 C22.2 DS24.K Dz1.1 J25.2 R57.2 U7.3 U9.3 U9.4 | length 27.8
  Top Layer w0.508: C19.2 93.599,128.524 97.393,128.524 U9.4 97.663,127.889 98.933,126.619 ; U9.3 98.933,126.619 ; Dz1.1 109.22,120.396 106.076,123.54 R57.2 C22.2 104.057,125.476 100.076,125.476 98.933,126.619
NetB1_1: B1.1 R2.2 R6.1 | length 8.1
  Bottom Layer w0.508: B1.1 168.884,66.32 R6.1 R2.2
NetB2_1: B2.1 R3.2 R7.1 | length 8.9
  Bottom Layer w0.508: B2.1 148.564,66.32 R7.1 R3.2
NetB3_1: B3.1 R4.2 R8.1 | length 8.9
  Bottom Layer w0.508: B3.1 134.848,66.32 R8.1 R4.2
NetB4_1: B4.1 R5.2 R9.1 | length 8.9
  Bottom Layer w0.508: B4.1 121.64,66.32 R9.1 R5.2
NetB5_0: B5.0 J15.2 R23.1 R27.2 | length 25.3
  Bottom Layer w0.508: J15.2 90.932,58.42 92.456,59.944 94.488,59.944 99.06,64.516 B5.0 104.14,64.516 R23.1 R27.2
NetB6_0: B6.0 J16.2 R24.1 R28.2 | length 46.6
  Bottom Layer w0.508: J16.2 84.328,58.42 86.868,60.96 93.472,60.96 96.012,63.5 96.012,76.708 100.076,80.772 B6.0 103.632,80.772 R24.1 R28.2
NetB7_0: B7.0 R25.1 R29.2 | length 9.3
  Bottom Layer w0.508: B7.0 103.632,97.028 R25.1 R29.2
NetB8_0: B8.0 R26.1 R30.2 | length 9.3
  Bottom Layer w0.508: B8.0 103.632,113.284 R26.1 R30.2
NetC5_2: C5.2 J9.1 R23.2 | length 6.4
  Bottom Layer w0.508: R23.2 C5.2 109.855,65.913 J9.1
NetC6_2: C6.2 J10.1 R24.2 | length 6.4
  Bottom Layer w0.508: R24.2 C6.2 109.855,81.661 J10.1
NetC7_2: C7.2 J11.1 R25.2 | length 6.4
  Bottom Layer w0.508: R25.2 C7.2 109.855,97.917 J11.1
NetC8_2: C8.2 J12.1 R26.2 | length 6.4
  Bottom Layer w0.508: R26.2 C8.2 109.855,114.173 J12.1
NetC22_1: C22.1 Dz1.2 R53.1 R57.1 U9.2 | length 19.1
  Top Layer w0.508: U9.2 100.203,127.381 100.584,127 102.152,127 C22.1 R57.1 106.076,128.62 108.712,125.984 R53.1 111.76,128.524 Dz1.2
NetC23_1: C23.1 R66.1 | length 2
  Top Layer w0.508: R66.1 C23.1
NetC25_1: C25.1 R70.1 | length 2
  Top Layer w0.508: R70.1 C25.1
NetC26_1: C26.1 R71.1 R73.1 U10.5 U10.10 U10.12 | length 20
  Top Layer w0.508: R71.1 C26.1 R73.1 75.184,124.968 ; U10.5 76.2,125.984 75.184,124.968 ; U10.12 78.74,120.904 78.232,120.396 76.708,120.396 76.2,120.904 U10.10 76.2,123.952 75.184,124.968
NetC27_1: C27.1 R76.1 | length 2
  Top Layer w0.508: R76.1 C27.1
NetDS1_K: DS1.K R11.1 | length 3.6
  Bottom Layer w0.508: DS1.K R11.1
NetDS2_K: DS2.K R12.1 | length 3.6
  Bottom Layer w0.508: DS2.K R12.1
NetDS3_K: DS3.K R13.1 | length 3.6
  Bottom Layer w0.508: DS3.K R13.1
NetDS4_K: DS4.K R14.1 | length 3.6
  Bottom Layer w0.508: DS4.K R14.1
NetDS5_K: DS5.K R15.1 | length 3.4
  Bottom Layer w0.508: DS5.K 123.444,83.312 R15.1
NetDS6_K: DS6.K R16.1 | length 3.4
  Bottom Layer w0.508: DS6.K 123.444,91.948 R16.1
NetDS7_K: DS7.K R17.1 | length 3.4
  Bottom Layer w0.508: DS7.K 123.444,100.584 R17.1
NetDS8_K: DS8.K R18.1 | length 3.4
  Bottom Layer w0.508: DS8.K 123.444,109.728 R18.1
NetDS9_K: DS9.K R33.1 | length 3.4
  Bottom Layer w0.508: R33.1 180.848,81.788 DS9.K
NetDS10_K: DS10.K R34.1 | length 3.4
  Bottom Layer w0.508: R34.1 180.848,72.644 DS10.K
NetDS11_K: DS11.K R35.1 | length 8.3
  Bottom Layer w0.508: DS11.K 171.196,52.832 169.164,54.864 169.164,55.88 171.196,57.912 R35.1
NetDS12_K: DS12.K R36.1 | length 7.8
  Bottom Layer w0.508: DS12.K 164.084,52.832 162.052,54.864 162.052,55.88 164.084,57.912 R36.1
NetDS13_K: DS13.K R37.1 | length 6.9
  Bottom Layer w0.508: R37.1 154.94,57.404 154.94,54.356 156.464,52.832 DS13.K
NetDS14_K: DS14.K R38.1 | length 6.9
  Bottom Layer w0.508: R38.1 143.764,57.404 143.764,54.356 145.288,52.832 DS14.K
NetDS15_K: DS15.K R39.1 | length 6.9
  Bottom Layer w0.508: R39.1 130.048,57.404 130.048,54.356 131.572,52.832 DS15.K
NetDS16_K: DS16.K R40.1 | length 6.9
  Bottom Layer w0.508: R40.1 116.84,57.404 116.84,54.356 118.364,52.832 DS16.K
NetDS17_K: DS17.K R41.1 | length 3.4
  Bottom Layer w0.508: R41.1 180.848,118.364 DS17.K
NetDS18_K: DS18.K R42.1 | length 3.4
  Bottom Layer w0.508: R42.1 180.848,109.22 DS18.K
NetDS19_K: DS19.K R43.1 | length 3.4
  Bottom Layer w0.508: R43.1 180.848,100.076 DS19.K
NetDS20_K: DS20.K R44.1 | length 3.4
  Bottom Layer w0.508: R44.1 180.848,90.932 DS20.K
NetDS21_K: DS21.K R49.2
NetDS22_A: DS22.A R45.2
NetDS23_A: DS23.A R46.2
NetDS24_A: DS24.A R47.2
NetDS25_A: DS25.A R48.2
NetJ5_1: J5.1 R19.2 | length 15
  Top Layer w0.508: v1(61.976,95.504) v1(71.628,95.504)
  Bottom Layer w0.508: v1(61.976,95.504) J5.1 ; v1(71.628,95.504) 71.755,95.504 R19.2
NetJ5_3: J5.3 U1.9 | length 26.5
  Top Layer w0.508: J5.3@62.484,103.632 62.484,104.14 64.516,106.172 82.296,106.172 85.09,108.966 U1.9
NetJ6_1: J6.1 R20.2 | length 16.5
  Top Layer w0.508: v1(61.976,82.296) 62.484,81.788 v1(73.152,81.788)
  Bottom Layer w0.508: v1(61.976,82.296) J6.1 ; v1(73.152,81.788) 73.152,83.693 R20.2
NetJ6_3: J6.3 U1.11 | length 36.8
  Top Layer w0.508: J6.3@62.484,90.424 62.484,90.932 64.516,92.964 81.788,92.964 82.296,93.472 82.296,103.632 85.09,106.426 U1.11
NetJ7_1: J7.1 R21.2 | length 17
  Top Layer w0.508: v1(61.976,68.072) 62.484,67.564 v1(73.152,67.564)
  Bottom Layer w0.508: v1(61.976,68.072) J7.1 J7.1@61.976,71.628 ; v1(73.152,67.564) 73.152,69.469 R21.2
NetJ7_3: J7.3 U1.13 | length 48.5
  Top Layer w0.508: J7.3@62.484,76.2 62.484,76.708 64.516,78.74 81.788,78.74 83.312,80.264 83.312,102.108 85.09,103.886 U1.13
NetJ8_1: J8.1 R22.2 | length 15.9
  Bottom Layer w0.508: J8.1 61.976,55.88 65.024,52.832 71.12,52.832 73.279,54.991 R22.2
NetJ8_3: J8.3 U1.15 | length 59.7
  Top Layer w0.508: J8.3@62.484,62.484 62.484,62.992 64.516,65.024 81.788,65.024 84.328,67.564 84.328,100.584 85.09,101.346 U1.15
NetJ9_3: J9.3 U2.9 | length 56.7
  Top Layer w0.508: v1(111.76,56.388) 112.776,56.388 114.3,57.912 114.3,72.136 115.316,73.152 115.316,85.852 117.348,87.884 131.064,87.884 134.016,90.836 U2.9
  Bottom Layer w0.508: v1(111.76,56.388) J9.3
NetJ10_3: J10.3 U2.11 | length 44.2
  Top Layer w0.508: v1(111.76,72.136) 112.776,72.136 114.3,73.66 114.3,86.36 116.84,88.9 130.556,88.9 132.08,90.424 132.08,94.488 132.842,95.25 U2.11
  Bottom Layer w0.508: v1(111.76,72.136) J10.3
NetJ11_3: J11.3 U2.13 | length 31.7
  Top Layer w0.508: v1(111.76,88.392) 114.808,88.392 116.332,89.916 130.048,89.916 131.064,90.932 131.064,96.012 132.842,97.79 U2.13
  Bottom Layer w0.508: v1(111.76,88.392) J11.3
NetJ12_3: J12.3 U2.15 | length 43.3
  Top Layer w0.508: v1(111.76,104.648) 114.3,102.108 114.3,92.964 116.332,90.932 129.54,90.932 130.048,91.44 130.048,97.536 132.842,100.33 U2.15
  Bottom Layer w0.508: v1(111.76,104.648) J12.3
NetJ13_2: J13.2 R19.1 S3.1 | length 49.3
  Top Layer w0.508: v1(57.404,73.152) 58.42,74.168 58.42,77.216 59.436,78.232 59.436,90.932 62.484,93.98 76.2,93.98 v1(76.708,94.488)
  Bottom Layer w0.508: J13.2 v1(57.404,73.152) ; S3.1 74.956,98.78 R19.1 v1(76.708,94.488)
NetJ14_2: J14.2 R20.1 S4.1 | length 45.4
  Top Layer w0.508: v1(57.404,63.5) 59.436,65.532 59.436,76.708 62.484,79.756 75.692,79.756 76.708,80.772 v1(76.708,81.788)
  Bottom Layer w0.508: J14.2 v1(57.404,63.5) ; S4.1 74.956,85.572 R20.1 v1(76.708,81.788)
NetJ20_2: J20.2 R31.2 | length 5.9
  Top Layer w0.508: v1(57.404,83.312) 57.912,83.82 R31.2
  Bottom Layer w0.508: J20.2 v1(57.404,83.312)
NetJ21_2: J21.2 R32.2 | length 5.5
  Bottom Layer w0.508: J21.2 56.896,93.472 57.912,94.488 R32.2@57.912,95.504
NetJ26_2: J26.2 J27.1
NetJ28_2: J28.2 R51.2 | length 5.8
  Top Layer w0.508: v1(61.468,171.704) R51.2
  Bottom Layer w0.508: J28.2 58.95,171.704 v1(61.468,171.704)
NetJ28_3: J28.3 R52.2 | length 5.7
  Top Layer w0.508: v1(61.468,175.768) R52.2
  Bottom Layer w0.508: J28.3 58.672,175.768 v1(61.468,175.768)
NetJ28_9: J28.9 R50.2 | length 12.4
  Top Layer w0.508: v1(61.468,179.832) R50.2
  Bottom Layer w0.508: J28.9 55.324,180.8 57.404,182.88 59.436,182.88 61.468,180.848 v1(61.468,179.832)
NetJ29_1: J29.1 R74.1 R77.1 | length 39.6
  Top Layer w0.508: v1(58.928,109.22) 61.468,109.22 63.5,111.252 73.152,111.252 74.168,112.268 83.82,112.268 85.344,113.792 R74.1
  Bottom Layer w0.508: J29.1 54.864,101.6 56.896,103.632 56.896,107.188 v1(58.928,109.22)
NetJ29_2: J29.2 R68.1 R72.1 | length 26.6
  Top Layer w0.508: v1(60.452,110.744) 60.96,110.744 62.484,112.268 72.136,112.268 73.66,113.792 R68.1
  Bottom Layer w0.508: J29.2 54.356,104.14 55.88,105.664 55.88,108.712 57.912,110.744 v1(60.452,110.744)
NetJ29_3: J29.3 R64.1 R67.1 | length 13.3
  Top Layer w0.508: v1(58.928,112.268) 60.452,112.268 61.976,113.792 R64.1
  Bottom Layer w0.508: J29.3 53.848,108.712 57.404,112.268 v1(58.928,112.268)
NetR1_1: R1.1 S1.1 | length 5.9
  Bottom Layer w0.508: R1.1 153.416,112.04 S1.1 S1.1@154.94,110.972
NetR10_1: R10.1 S2.1 | length 5.9
  Bottom Layer w0.508: R10.1 153.416,97.308 S2.1 S2.1@154.94,96.24
NetR11_2: R11.2 U1.7 U1.8 | length 20.6
  Top Layer w0.508: U1.8 U1.7 v1(94.996,107.696)
  Bottom Layer w0.508: R11.2 92.456,96.012 91.44,97.028 91.44,104.14 v1(94.996,107.696)
NetR12_2: R12.2 U1.5 U1.6 | length 28
  Top Layer w0.508: U1.6 U1.5 v1(94.996,105.156)
  Bottom Layer w0.508: R12.2 94.488,85.725 94.488,96.012 92.456,98.044 92.456,102.616 v1(94.996,105.156)
NetR13_2: R13.2 U1.3 U1.4 | length 34.1
  Top Layer w0.508: U1.4 U1.3 v1(94.996,102.616)
  Bottom Layer w0.508: R13.2 92.456,77.216 95.504,80.264 95.504,97.028 93.472,99.06 93.472,101.092 v1(94.996,102.616)
NetR14_2: R14.2 U1.1 U1.2 | length 39.8
  Top Layer w0.508: U1.2 U1.1 v1(94.996,100.076)
  Bottom Layer w0.508: R14.2 92.456,68.58 94.488,70.612 94.488,77.216 96.52,79.248 96.52,98.552 v1(94.996,100.076)
NetR15_2: R15.2 U2.7 U2.8 | length 11.1
  Top Layer w0.508: v1(125.984,93.472) 126.492,93.98 U2.7 U2.8
  Bottom Layer w0.508: R15.2 125.984,88.773 v1(125.984,93.472)
NetR16_2: R16.2 U2.5 U2.6 | length 5.8
  Top Layer w0.508: v1(125.984,96.012) 126.492,96.52 U2.5 U2.6
  Bottom Layer w0.508: R16.2 125.349,95.377 v1(125.984,96.012)
NetR17_2: R17.2 U2.3 U2.4 | length 9.8
  Top Layer w0.508: v1(125.984,98.552) 126.492,99.06 U2.3 U2.4
  Bottom Layer w0.508: R17.2 125.984,101.981 v1(125.984,98.552)
NetR18_2: R18.2 U2.1 U2.2 | length 14
  Top Layer w0.508: v1(125.984,104.14) 128.016,102.108 U2.1 U2.2
  Bottom Layer w0.508: R18.2 125.984,111.125 v1@125.984,104.648
NetR21_1: R21.1 S5.1 | length 5.8
  Bottom Layer w0.508: S5.1 74.956,71.348 R21.1
NetR22_1: R22.1 S6.1 | length 5.8
  Bottom Layer w0.508: S6.1 74.956,57.632 R22.1
NetR33_2: R33.2 U3.7 U3.8 | length 12
  Top Layer w0.508: U3.7 U3.8 179.832,76.708 v1(180.34,76.2)
  Bottom Layer w0.508: v1(180.34,76.2) R33.2
NetR34_2: R34.2 U3.5 U3.6 | length 19.4
  Top Layer w0.508: U3.5 U3.6 169.418,74.93 177.292,67.056 v1(180.34,67.056)
  Bottom Layer w0.508: v1(180.34,67.056) R34.2
NetR35_2: R35.2 U3.3 U3.4 | length 26.7
  Top Layer w0.508: U3.3 U3.4 166.878,75.438 171.196,71.12 171.196,64.516 v1(177.8,57.912)
  Bottom Layer w0.508: R35.2 v1(177.8,57.912)
NetR36_2: R36.2 U3.1 U3.2 | length 24.8
  Top Layer w0.508: U3.1 U3.2 164.338,74.93 165.608,73.66 167.132,73.66 170.18,70.612 v1(170.18,59.436)
  Bottom Layer w0.508: R36.2@168.148,57.912 R36.2 169.545,59.436 v1(170.18,59.436)
NetR37_2: R37.2 U4.7 U4.8 | length 34.9
  Top Layer w0.508: U4.7 U4.8 146.812,76.708 151.384,72.136 151.384,59.944 153.416,57.912 v1(161.036,57.912)
  Bottom Layer w0.508: R37.2 v1(161.036,57.912)
NetR38_2: R38.2 U4.5 U4.6 | length 30.2
  Top Layer w0.508: U4.6 U4.5 140.716,59.944 142.748,57.912 v1(149.86,57.912)
  Bottom Layer w0.508: R38.2 v1(149.86,57.912)
NetR39_2: R39.2 U4.3 U4.4 | length 23.1
  Top Layer w0.508: v1(136.144,57.912) 138.176,59.944 U4.3 U4.4
  Bottom Layer w0.508: R39.2 v1(136.144,57.912)
NetR40_2: R40.2 U4.1 U4.2 | length 30.2
  Top Layer w0.508: v1(124.968,57.912) 128.524,61.468 128.524,72.136 133.096,76.708 U4.1 U4.2
  Bottom Layer w0.508: R40.2 v1(124.968,57.912)
NetR41_2: R41.2 U5.7 U5.8 | length 20.1
  Top Layer w0.508: U5.8 U5.7 v1(176.784,100.076)
  Bottom Layer w0.508: v1(176.784,100.076) 177.8,101.092 177.8,105.156 178.816,106.172 178.816,113.411 R41.2
NetR42_2: R42.2 U5.5 U5.6 | length 13.5
  Top Layer w0.508: U5.6 U5.5 v1(176.784,97.536)
  Bottom Layer w0.508: v1(176.784,97.536) 178.816,99.568 178.816,104.267 R42.2
NetR43_2: R43.2 U5.3 U5.4 | length 8
  Top Layer w0.508: U5.4 U5.3 v1(176.784,94.996)
  Bottom Layer w0.508: v1(176.784,94.996) 178.689,94.996 R43.2
NetR44_2: R44.2 U5.1 U5.2 | length 10.8
  Top Layer w0.508: U5.2 U5.1 v1(176.784,92.456)
  Bottom Layer w0.508: v1(176.784,92.456) 178.816,90.424 178.816,88.138 179.451,87.503 R44.2
NetR50_1: R50.1 R54.1
NetR51_1: R51.1 R55.1
NetR52_1: R52.1 R56.1
NetR58_1: R58.1 R60.1 U10.3 | length 19.2
  Top Layer w0.508: U10.3 78.74,128.524 80.264,130.048 86.36,130.048 88.392,128.016 91.44,128.016 92.456,127 R58.1 R60.1
NetR58_2: R58.2 U9.7 | length 11.5
  Top Layer w0.508: R58.2 92.456,122.428 93.472,121.412 99.06,121.412 100.203,120.269 U9.7
NetR59_1: R59.1 R61.1 U10.2 | length 12.5
  Top Layer w0.508: U10.2 80.01,128.27 80.772,129.032 85.852,129.032 R61.1 R59.1
NetR59_2: R59.2 U9.6 | length 11.8
  Top Layer w0.508: R59.2 90.424,122.428 92.456,120.396 98.044,120.396 98.933,119.507 U9.6
NetR61_2: R61.2 U10.1 | length 10.5
  Top Layer w0.508: U10.1 81.788,128.016 85.344,128.016 86.868,126.492 86.868,124.587 R61.2
NetR62_2: R62.2 R63.1
NetR64_2: R64.2 R65.1 U10.6 | length 27.2
  Top Layer w0.508: R65.1 65.532,114.3 62.992,116.84 R64.2 64.008,118.237 64.008,126.492 66.548,129.032 74.168,129.032 74.93,128.27 U10.6
NetR65_2: R65.2 R66.2 U10.7 | length 20.3
  Top Layer w0.508: R66.2 R65.2 65.024,117.729 65.024,125.984 66.548,127.508 U10.7
NetR68_2: R68.2 R69.1 U10.9 | length 14.9
  Top Layer w0.508: U10.9 74.93,123.19 74.676,123.444 73.152,123.444 72.644,122.936 72.644,119.888 74.676,117.856 74.676,116.84 77.216,114.3 R69.1
NetR69_2: R69.2 R70.2 U10.8 | length 8.2
  Top Layer w0.508: U10.8 73.66,120.904 R69.2@77.279,117.284 ; R69.2 R70.2
NetR74_2: R74.2 R75.1 U10.13 | length 13.6
  Top Layer w0.508: U10.13 80.01,121.158 80.772,120.396 83.82,120.396 86.36,117.856 R74.2 86.36,116.84 88.9,114.3 R75.1
NetR75_2: R75.2 R76.2 U10.14 | length 11.6
  Top Layer w0.508: U10.14 81.776,121.412 84.836,121.412 89.027,117.221 R76.2
PORT: C1.1 C2.1 C3.1 C4.1 J1.2 J2.2 J3.2 J4.2 J5.2 J6.2 J7.2 J8.2 J9.2 J10.2 J11.2 J12.2 J17.1 J17.2 J18.1 J18.2 J19.1 J19.2 P1.2 P2.2 P3.2 P4.2 P5.2 R1.2 R2.1 R3.1 R4.1 R5.1 R10.2 R31.1 R32.1 U3.9 U3.11 U3.13 U3.15 U4.9 U4.11 U4.13 U4.15 U5.9 U5.11 U5.13 U5.15 | length 1238.2
  Top Layer w0.508: R31.1 57.912,91.948 v1(59.436,93.472) ; v1(131.572,83.312) 135.128,79.756 149.352,79.756 v1(151.384,77.724) ; v1(133.096,84.836) 136.144,84.836 136.906,84.074 U4.15 ; v1(134.62,86.36) 137.16,86.36 139.446,84.074 U4.13 ; v1(136.144,87.884) 138.176,87.884 141.986,84.074 U4.11 ; v1(137.668,89.408) 139.192,89.408 144.526,84.074 U4.9 ; v1(156.972,103.124) 164.084,103.124 v1(164.592,103.632) ; v1(156.972,117.856) v1(163.576,117.856) ; U3.15 164.338,85.09 v1(164.592,85.344) ; v1(165.608,93.98) 165.862,93.726 U5.15 ; v1(165.608,96.52) 165.862,96.266 U5.13 ; v1(165.608,99.06) 165.862,98.806 U5.11 ; v1(165.608,101.6) 165.862,101.346 U5.9 ; U3.13 166.878,85.09 v1(167.132,85.344) ; U3.11 169.418,85.09 v1(169.672,85.344) ; U3.9 171.958,85.09 v1(172.212,85.344) ; v1(218.948,61.468) 228.6,61.468 229.382,60.686 P4.2 ; v1(220.472,84.836) 228.092,84.836 229.382,83.546 P5.2 ; v1(221.488,107.188) 228.6,107.188 229.382,106.406 P3.2
  Bottom Layer w0.508: J19.1 55.372,112.268 58.42,115.316 ; J19.2 56.388,114.808 57.404,115.824 ; R32.1 58.42,99.568 58.42,105.156 62.484,109.22 62.484,114.3 ; v1(59.436,93.472) 59.436,104.648 63.5,108.712 63.5,114.3 ; J8.2 65.024,59.944 67.564,62.484 67.564,114.3 ; J7.2 65.024,73.66 66.548,75.184 66.548,114.3 ; J6.2 64.008,87.884 65.532,89.408 65.532,114.3 ; J5.2 63.5,101.092 64.516,102.108 64.516,114.3 ; J9.2 112.776,61.468 114.3,62.992 114.3,77.216 115.316,78.232 115.316,92.964 116.332,93.98 116.332,108.712 117.348,109.728 117.348,117.856 ; J10.2 112.776,77.216 114.3,78.74 114.3,93.472 115.316,94.488 115.316,109.22 116.332,110.236 116.332,117.856 ; J11.2 112.776,93.472 114.3,94.996 114.3,109.728 115.316,110.744 115.316,117.856 ; J12.2 112.776,109.728 114.3,111.252 114.3,117.856 ; C4.1 126.492,67.564 R5.1 128.524,73.66 128.524,119.38 ; 129.54,119.38 129.54,76.2 131.572,74.168 136.144,74.168 137.668,72.644 R4.1 139.7,67.564 C3.1 ; 130.556,119.38 130.556,84.328 v1(131.572,83.312) ; 131.572,119.38 131.572,86.36 v1(133.096,84.836) ; 132.588,119.38 132.588,88.392 v1(134.62,86.36) ; 133.604,119.38 133.604,90.424 v1(136.144,87.884) ; 134.62,119.38 134.62,92.456 v1(137.668,89.408) ; v1(151.384,77.724) R3.1 C2.1 ; R10.2 156.845,102.997 v1(156.972,103.124) ; R1.2 156.845,117.729 v1(156.972,117.856) ; v1(163.576,117.856) 164.084,118.364 164.084,119.38 ; v1(164.592,85.344) 170.18,90.932 170.18,119.38 ; v1(164.592,103.632) 165.1,104.14 165.1,119.38 ; v1(165.608,93.98) 169.164,97.536 169.164,119.38 ; v1(165.608,96.52) 168.148,99.06 168.148,119.38 ; v1(165.608,99.06) 167.132,100.584 167.132,119.38 ; v1(165.608,101.6) 166.116,102.108 166.116,119.38 ; v1(167.132,85.344) 171.196,89.408 171.196,119.38 ; R2.1 172.212,69.088 ; v1(169.672,85.344) 172.212,87.884 172.212,119.38 ; C1.1 172.212,69.088 ; v1(172.212,85.344) 173.228,86.36 173.228,119.38 ; 174.244,119.38 174.244,71.12 172.212,69.088 ; 187.96,128.016 187.96,121.412 189.992,119.38 193.528,119.38 P1.2 ; P2.2 213.344,122.92 217.932,127.508 217.932,129.54 ; v1(218.948,61.468) 218.948,129.54 ; 219.964,129.54 219.964,85.344 v1(220.472,84.836) ; 220.98,129.54 220.98,107.696 v1(221.488,107.188)
VCC: DSP*1.41
pads on no net: B1.2 B2.2 B3.2 B4.2 B5.2 B6.2 B7.2 B8.2 DSP*1.1 DSP*1.2 DSP*1.3 DSP*1.4 DSP*1.5 DSP*1.6 DSP*1.7 DSP*1.8 DSP*1.9 DSP*1.10 DSP*1.11 DSP*1.12 DSP*1.13 DSP*1.14 DSP*1.15 DSP*1.16 DSP*1.17 DSP*1.18 DSP*1.19 DSP*1.20 DSP*1.21 DSP*1.23 DSP*1.24 DSP*1.25 DSP*1.26 DSP*1.27 DSP*1.28 DSP*1.29 DSP*1.30 DSP*1.31 DSP*1.32 DSP*1.33 DSP*1.34 DSP*1.35 DSP*1.36 DSP*1.37 DSP*1.38 DSP*1.39 DSP*1.40 DSP*1.42 DSP*1.43 DSP*1.44 DSP*1.45 DSP*1.46 DSP*1.47 DSP*1.48 DSP*1.49 DSP*1.50 DSP*1.51 DSP*1.52 DSP*1.53 DSP*1.54 DSP*1.55 DSP*1.56 DSP*1.57 DSP*1.58 DSP*1.59 DSP*1.60 DSP*1.61 DSP*1.62 DSP*1.63 DSP*1.64 DSP*1.65 DSP*1.66 DSP*1.67 DSP*1.68 DSP*1.69 DSP*1.70 DSP*1.71 DSP*1.72 DSP*1.73 DSP*1.74 DSP*1.75 DSP*1.76 DSP*1.77 DSP*1.78 DSP*1.79 DSP*1.80 DSP*1.81 DSP*1.82 DSP*1.83 DSP*1.84 DSP*1.85 DSP*1.86 DSP*1.87 DSP*1.88 DSP*1.89 DSP*1.90 DSP*1.91 DSP*1.92 DSP*1.93 DSP*1.94 DSP*1.95 DSP*1.96 DSP*1.97 DSP*1.98 DSP*1.99 DSP*1.100 DSP*1.101 DSP*1.102 DSP*1.103 DSP*1.104 DSP*1.105 DSP*1.106 DSP*1.107 DSP*1.108 DSP*1.109 DSP*1.110 J28.4 J28.5 J28.7 J28.8 P1.1' P1.2' P1.3' P2.1' P2.2' P2.3' P3. P4. P5.
copper on no net:
  other v1: 77.724,192.024 80.264,192.024
  other v2: 190.872,57.824 208.144,57.824 199.272,59.024 216.544,59.024 199.272,121.824 216.544,121.824 190.872,123.024 208.144,123.024

## Other copper
Top Layer:
  text "CHECK HOLE SIZE" at 95.504,180.34 h1.52

## Text inside footprints (layer, text, board x,y; h text height)
J28: Top Overlay "6" at 52.219,170.605 h1.5 r90; Top Overlay "9" at 52.219,178.915 h1.5 r90; Top Overlay "5" at 61.619,180.3 h1.5 r90; Top Overlay "1" at 61.619,169.47 h1.5 r90